# Altium PCB PCB1.PcbDoc
Units mm, origin at the board's own origin, x right, y up, seen from the top; angles counter-clockwise.
Board outline 66.04 x 88.27 mm, 2 copper layers (Top Layer, Bottom Layer); 13 components, 13 nets, 29 pads, 0 vias.
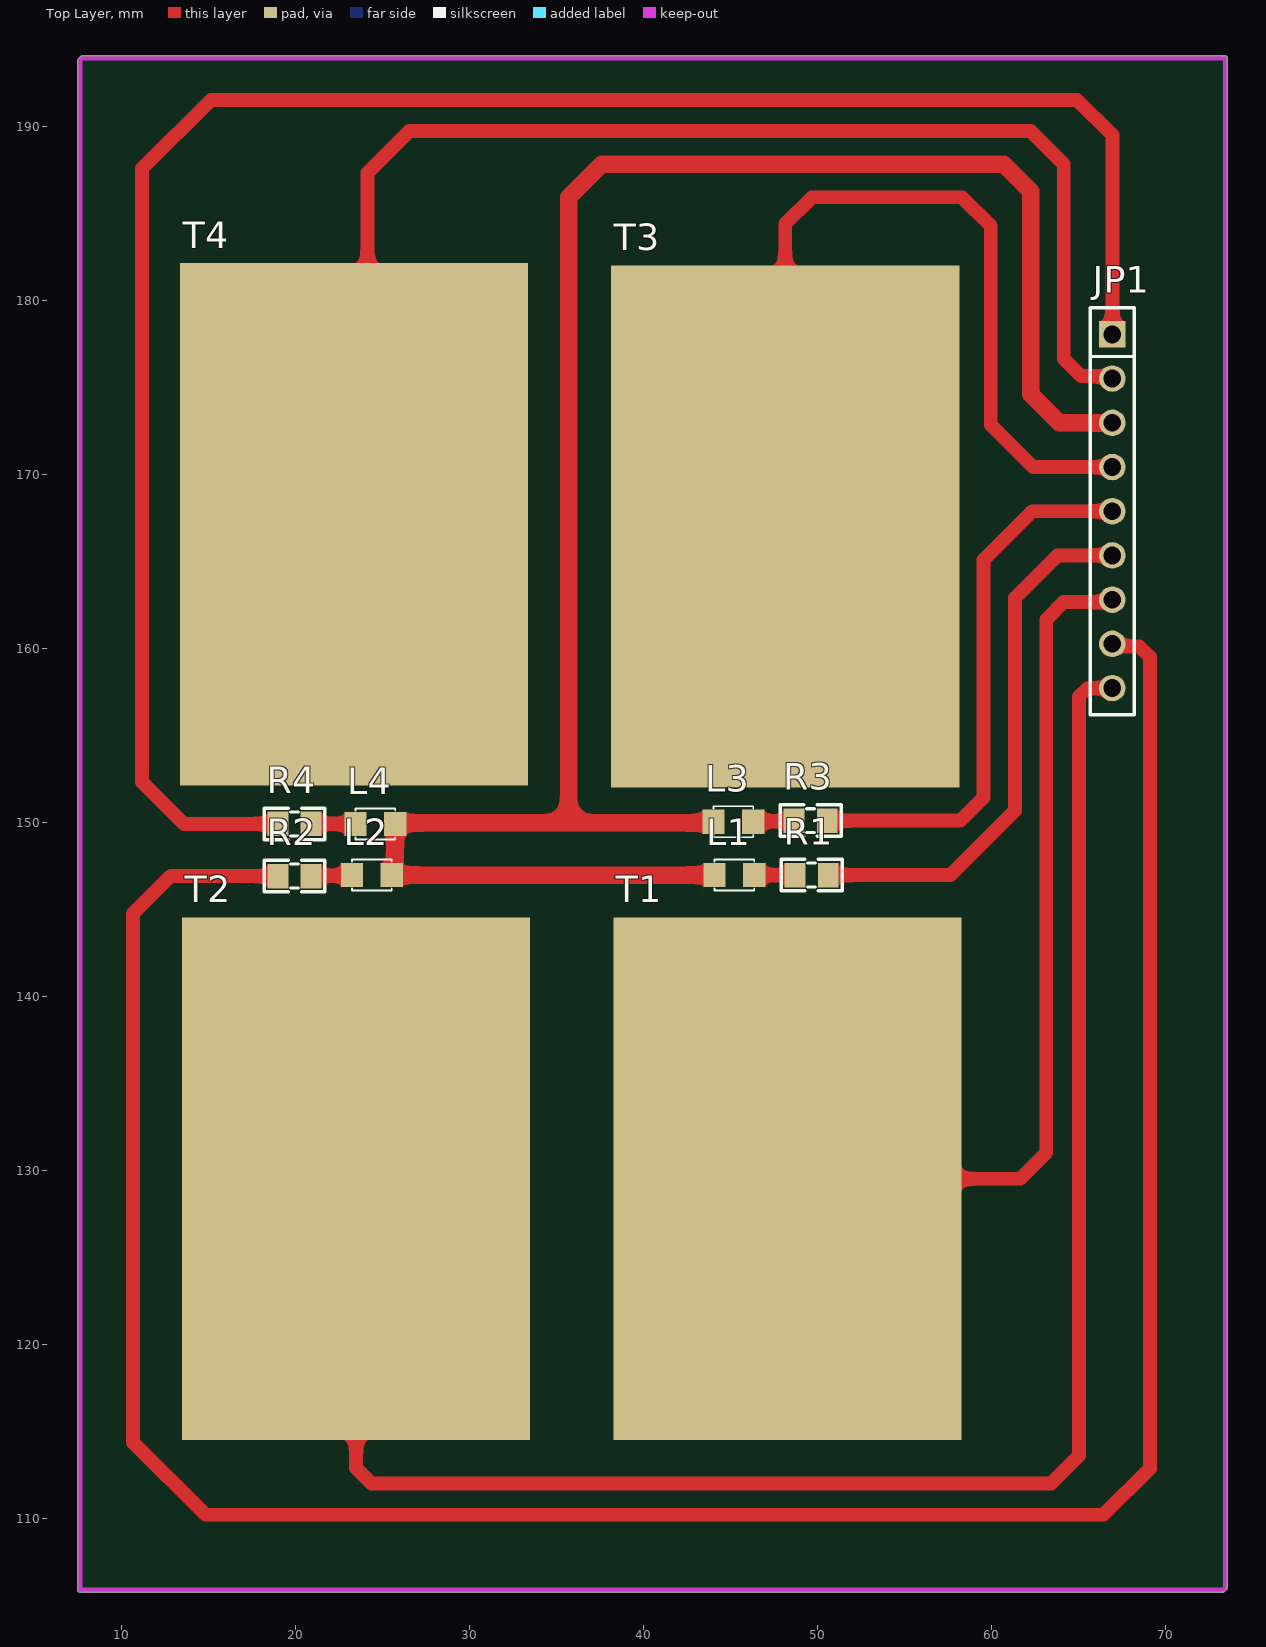
[diagram p0: Top Layer view]
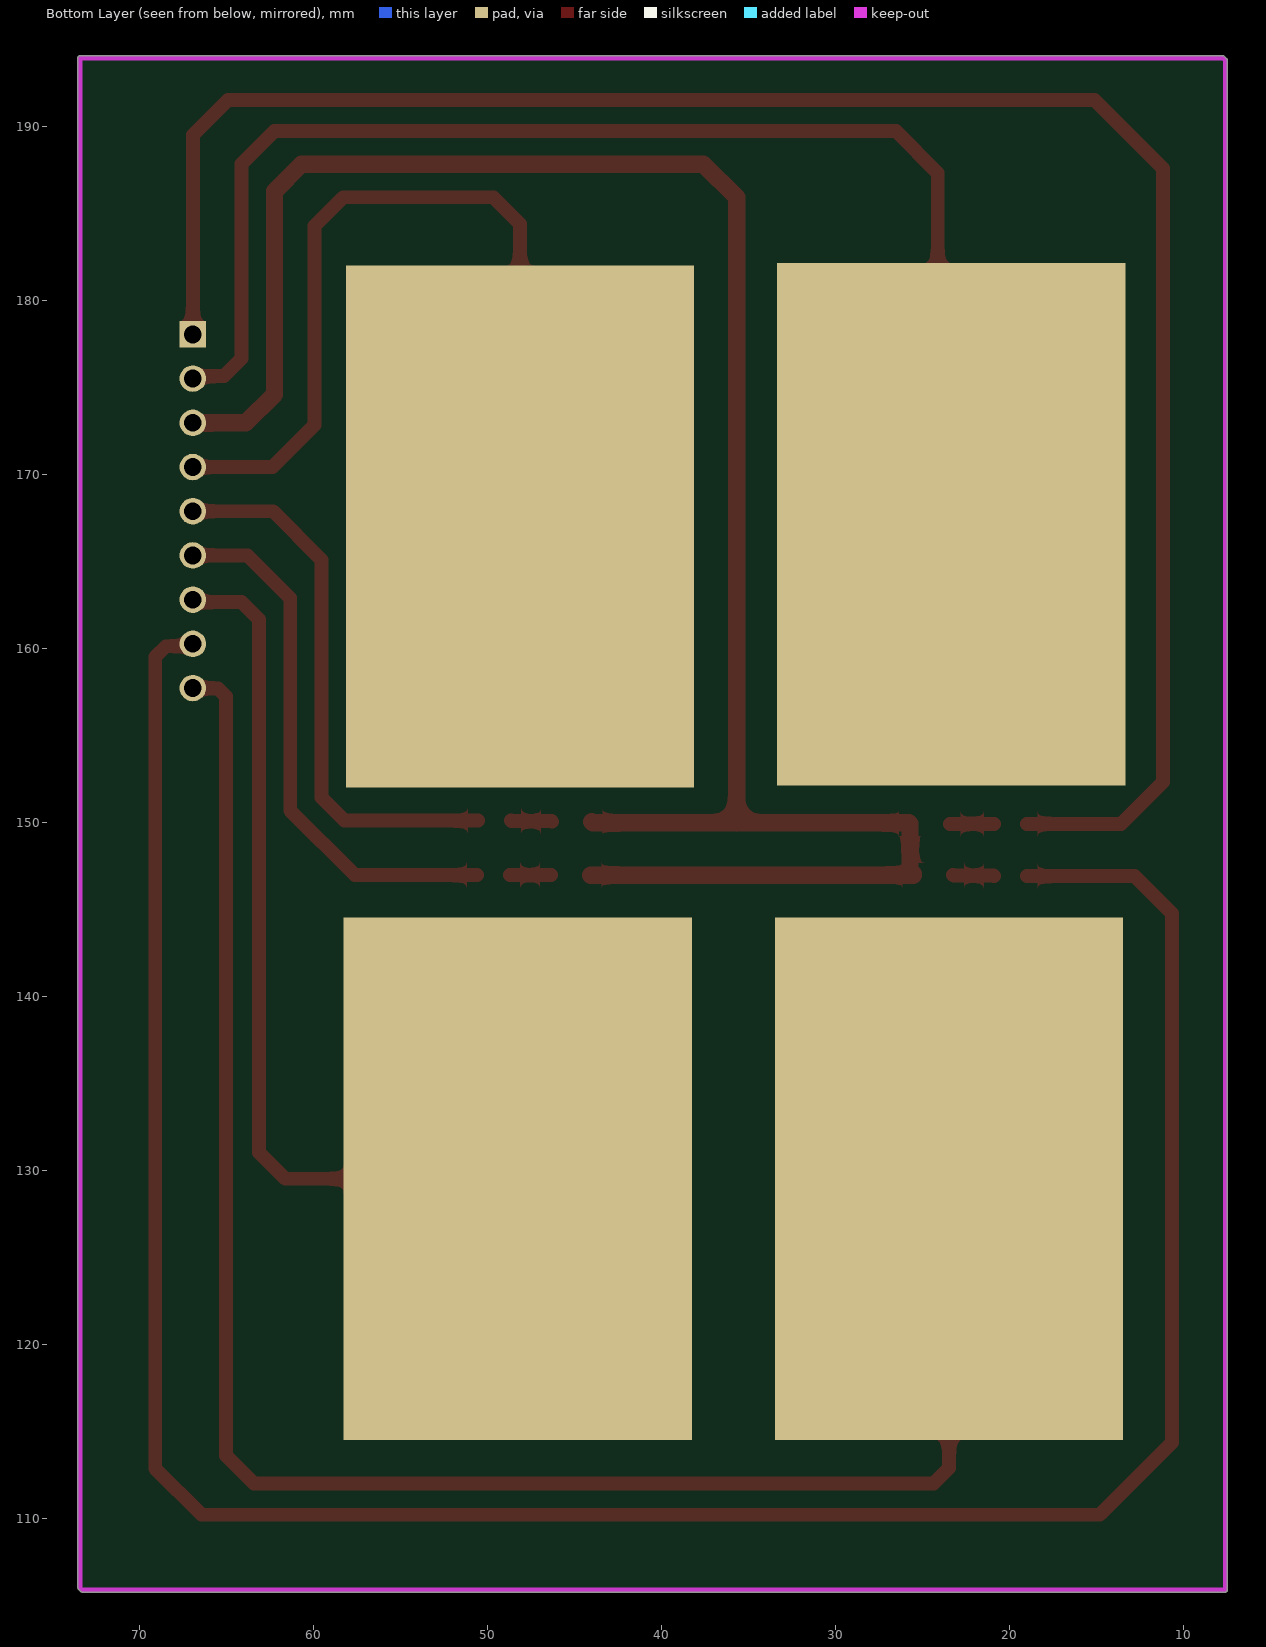
[diagram p1: Bottom Layer view, seen from below]
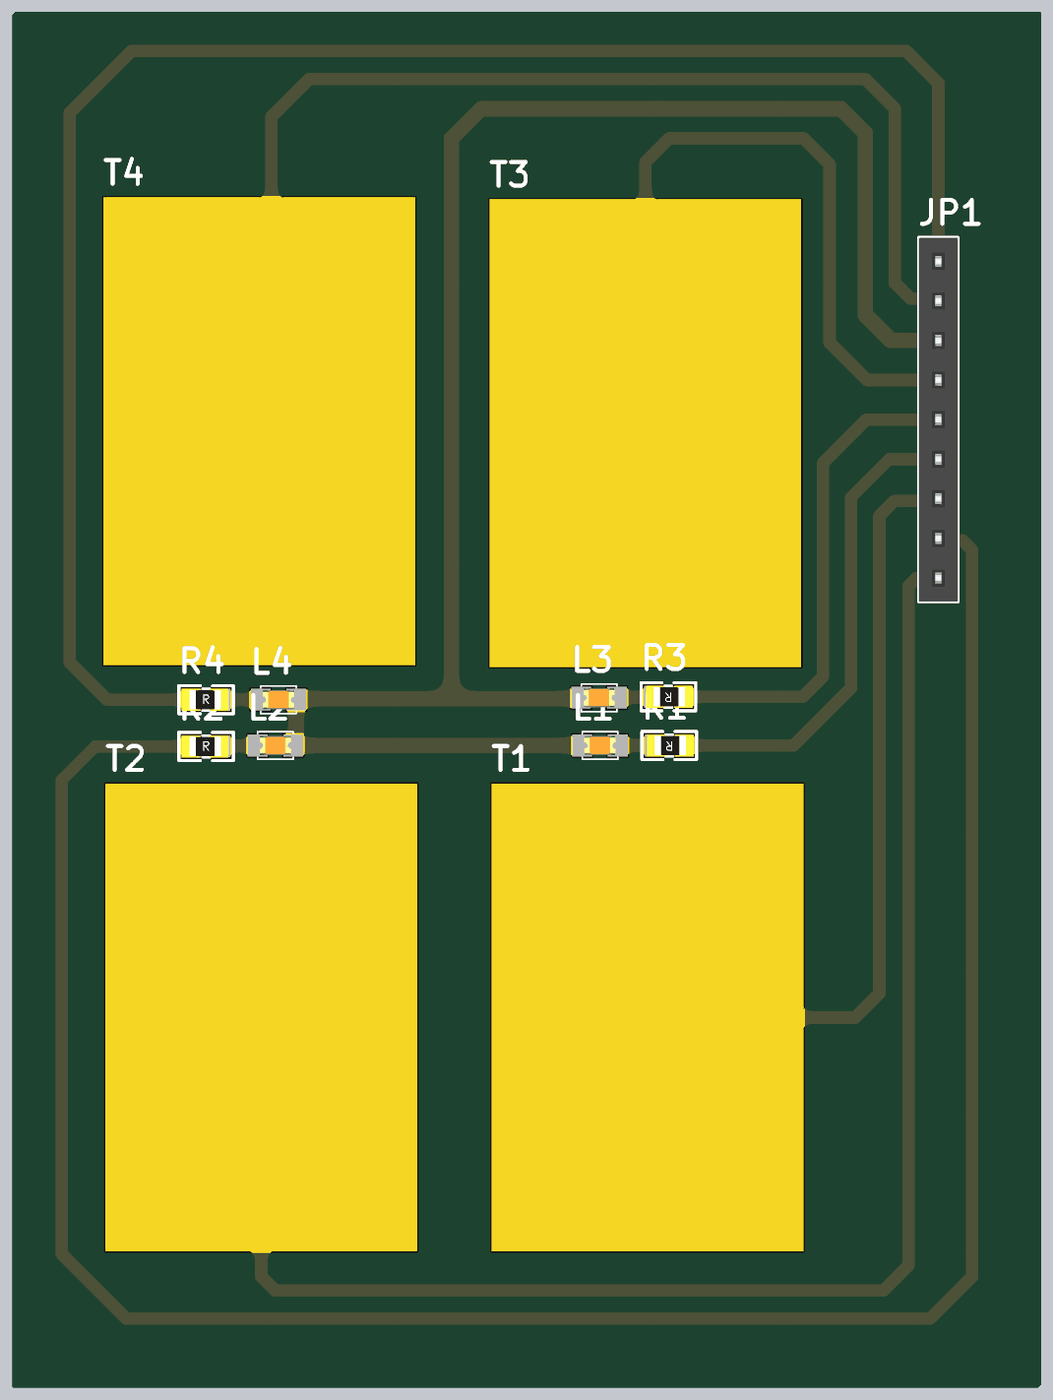
[diagram p2: 3D render of the assembled board from above, using the file's embedded part models]

## Layer stack, top to bottom
Top Solder: solder mask 0.0102, Solder Resist, Dk 3.5
Top Layer: signal copper 0.0356
Dielectric 1: dielectric 0.32, FR-4, Dk 4.8
Bottom Layer: signal copper 0.0356
Bottom Solder: solder mask 0.0102, Solder Resist, Dk 3.5

## Board outline
7.493,105.918 7.493,193.802 cw(c7.62,193.802) 7.53,193.893 7.657,194.019 cw(c7.747,193.93) 7.747,194.056 73.406,194.056 cw(c73.406,193.929) 73.533,193.929 73.533,106.045 cw(c73.406,106.045) 73.496,105.954 73.369,105.828 cw(c73.279,105.917) 73.279,105.791 7.62,105.791 cw(c7.62,105.918)

## Design rules (kind name [scope] priority, off if disabled: settings)
Clearance [All] p1: gap=1 ignorepadtopadclearanceinfootprint=FALSE
PolygonConnect [All] p1: connectstyle=Relief reliefconductorwidth=0.254 reliefentries=4 polygonreliefangle="90 Angle" airgapwidth=0.254
RoomDefinition Sheet1 [InComponentClass('Sheet1')] p1: confinementstyle=ConfineIn formatcopy=TRUE lockcomponents=FALSE outline 0,0 50.8,0 50.8,25.4 0,25.4
RoutingVias [All] p1: holewidth=0.711 width=1.27 viastyle="Through Hole" minholewidth=0.711 minwidth=1.27 maxholewidth=0.711 maxwidth=1.27
SolderMaskExpansion [All] p1: expansion=0.102 istentingtop=FALSE
Width VCC5 [InNet('VCC5')] p1: maxlimit=1 minlimit=1 preferedwidth=1
Width VCC_IN [InNet('VCC_IN')] p2: maxlimit=1 minlimit=1 preferedwidth=1
Width VCC33 [InNet('VCC5')] p3: maxlimit=1 minlimit=1 preferedwidth=1
Width GND [InNet('GND')] p4: maxlimit=1 minlimit=1 preferedwidth=1
Width [All] p5: maxlimit=0.8 minlimit=0.8 preferedwidth=0.8
30 further rules are at their usual default settings.

## Components (designator, comment, footprint, x,y, rotation, side; value= is the part's Value field where it differs from the comment)
JP1 "JP 1x9 2.54" "JP 1x9 CT" 66.929,167.894 r270 top
L1 "LED 0805" LED-0805-Orange 46.355,146.99 r180 top
L2 "LED 0805" LED-0805-Orange 23.241,146.99 r0 top
L3 "LED 0805" LED-0805-Orange 46.298,150.055 r180 top
L4 "LED 0805" LED-0805-Orange 23.438,149.928 r0 top
R1 "33k" "tro smd 0805" 49.657,146.928 r180 top
R2 "33k" "tro smd 0805" 19.939,146.992 r0 top
R3 "33k" "tro smd 0805" 49.6,150.053 r180 top
R4 "33k" "tro smd 0805" 19.939,149.989 r0 top
T1 "F1A" Touch 47.26,138.54 r0 top value=Fuse
T2 "F1A" Touch 22.479,138.54 r0 top value=Fuse
T3 "F1A" Touch 47.133,176.022 r0 top value=Fuse
T4 "F1A" Touch 22.352,176.149 r0 top value=Fuse

## Footprints (in the part's own frame and the unit in brackets; to place one, negate y for a bottom-side part, rotate by r counter-clockwise, add the part's x,y. Pads: shape width x height; smd on the part's side, far side on the other; paste and mask are expansions set on the pad)
"JP 1x9 CT" [mm] "9 row, straight, gold plating"
  rect 1.52x1.52 hole 1.02: 1(-10.16,0)
  round 1.52 hole 1.02: 2(-7.62,0) 3(-5.08,0) 4(-2.54,0) 5(0,0) 6(2.54,0) 7(5.08,0) 8(7.62,0) 9(10.16,0)
  silkscreen extent -11.68,-1.27 11.68,1.27, body extent -11.68,-1.25 11.68,1.25, height 8.51
LED-0805-Orange [mil]
  rect 50x55 smd: 1(0,0) 2(90,0)
  silkscreen extent 0,-35 90,35, body extent 5,-25 85,25, height 43
Touch [mm]
  rect 20x30 all layers, no hole: 1(1,-9)
"tro smd 0805" [mm]
  rect 1.2x1.4 smd: 1(-0.946,-0.061) 2(0.954,-0.061)
  silkscreen extent -1.75,-0.97 1.75,0.84, body extent -1.56,-0.76 1.44,0.64, height 0.53

## Part data
JP1: library part "JP 1x9 2.54 Cai Thang", "Cắm", Chung_Loai=Cắm, Don_Vi=Con, Ma_Hang=MH004006, Ten_Linh_Kien="Jump Đơn Cái 2.54MM 1x20P Thẳng"
L1 L2 L3 L4: library part "LED 0805 Cam", "Dán", Chung_Loai=Dán, Don_Vi=Con, Ma_Hang=MH002328, Ten_Linh_Kien="LED 0805 Màu Cam ( Orange)"
R1 R2 R3 R4: library part "Tro 0805 1% 33k", "Dán", Chung_Loai=Dán, Don_Vi=Con, Ma_Hang=MH005478, So_Chan=2, Ten_Linh_Kien="Trở 0805 1% 33k"
T1 T2 T3 T4: library part Touch, "Fuse", Designed by=VanDungEvn

## Nets (pads, with @x,y where several pads share a name; then routed paths per layer and width w, separated by ;. In a path a pad name is that pad's centre, name@x,y a point inside that pad or via, vN(x,y) a via of type N, cw(c..) or ccw(c..) an arc to the next point about the centre after c; other vN are vias at no path point)
GND: JP1.3 L1.2 L2.2 L3.2 L4.2 | length 120.9
  Top Layer w1: L3.2 43.949,149.991 35.687,149.991 ; L1.2 L2.2 25.527,147.054 25.724,147.251 L4.2 25.788,149.991 35.687,149.991 ; JP1.3 63.886,172.974 62.235,174.625 62.235,186.284 60.686,187.833 37.592,187.833 35.687,185.928 35.687,149.991
LED_1: JP1.6 R1.1 | length 31.1
  Top Layer w0.8: R1.1 57.625,146.989 61.333,150.697 61.333,158.178 61.333,162.91 63.777,165.354 JP1.6
LED_2: JP1.8 R2.1 | length 149.9
  Top Layer w0.8: R2.1 12.827,146.931 10.668,144.772 10.668,114.388 14.82,110.236 66.421,110.236 69.089,112.904 69.089,159.511 68.464,160.136 67.067,160.136 JP1.8
LED_3: JP1.5 R3.1 | length 31.7
  Top Layer w0.8: R3.1 58.205,150.114 59.533,151.442 59.533,158.924 59.533,165.1 62.327,167.894 JP1.5
LED_4: JP1.1 R4.1 | length 113.7
  Top Layer w0.8: R4.1 13.593,149.928 11.176,152.345 11.176,187.579 15.13,191.533 64.897,191.533 66.929,189.501 JP1.1
NetL1_1: L1.1 R1.2 | length 2.3
  Top Layer w0.8: L1.1 R1.2
NetL2_1: L2.1 R2.2 | length 2.4
  Top Layer w0.8: R2.2 20.923,146.961 23.211,146.961 L2.1
NetL3_1: L3.1 R3.2 | length 2.4
  Top Layer w0.8: L3.1 46.328,150.084 48.616,150.084 R3.2
NetL4_1: L4.1 R4.2 | length 2.5
  Top Layer w0.8: R4.2 L4.1
TOUCH1: JP1.7 T1.1 | length 50.4
  Top Layer w0.8: T1.1 61.612,129.54 63.133,131.061 63.133,161.685 64.124,162.676 66.791,162.676 JP1.7
TOUCH2: JP1.9 T2.1 | length 104.9
  Top Layer w0.8: T2.1 23.479,112.919 24.362,112.036 63.412,112.036 65.024,113.648 65.024,157.251 65.493,157.72 66.915,157.72 JP1.9
TOUCH3: JP1.4 T3.1 | length 49.9
  Top Layer w0.8: T3.1 48.133,184.404 49.662,185.933 58.288,185.933 59.944,184.277 59.944,172.847 62.357,170.434 JP1.4
TOUCH4: JP1.2 T4.1 | length 76.7
  Top Layer w0.8: T4.1 24.13,167.927 24.13,187.325 26.538,189.733 62.235,189.733 64.135,187.833 64.135,176.657 65.14,175.652 66.791,175.652 JP1.2

## Keep-outs
Keep-Out Layer:
  lines w0.254: 7.62,193.802 7.747,193.929 ; 7.62,193.802 7.747,193.929 ; 7.62,193.802 7.62,105.918 73.279,105.918 73.406,106.045 73.406,193.929 10.287,193.929 7.747,193.929